# Altium PCB BtPS-250.PcbDoc
Units mm, origin at the board's own origin, x right, y up, seen from the top; angles counter-clockwise.
Board outline 228 x 101 mm, 2 copper layers (Top Layer, Bottom Layer); 151 components, 89 nets, 441 pads, 4 vias.
Unrouted connection lines stored in the file: 92.
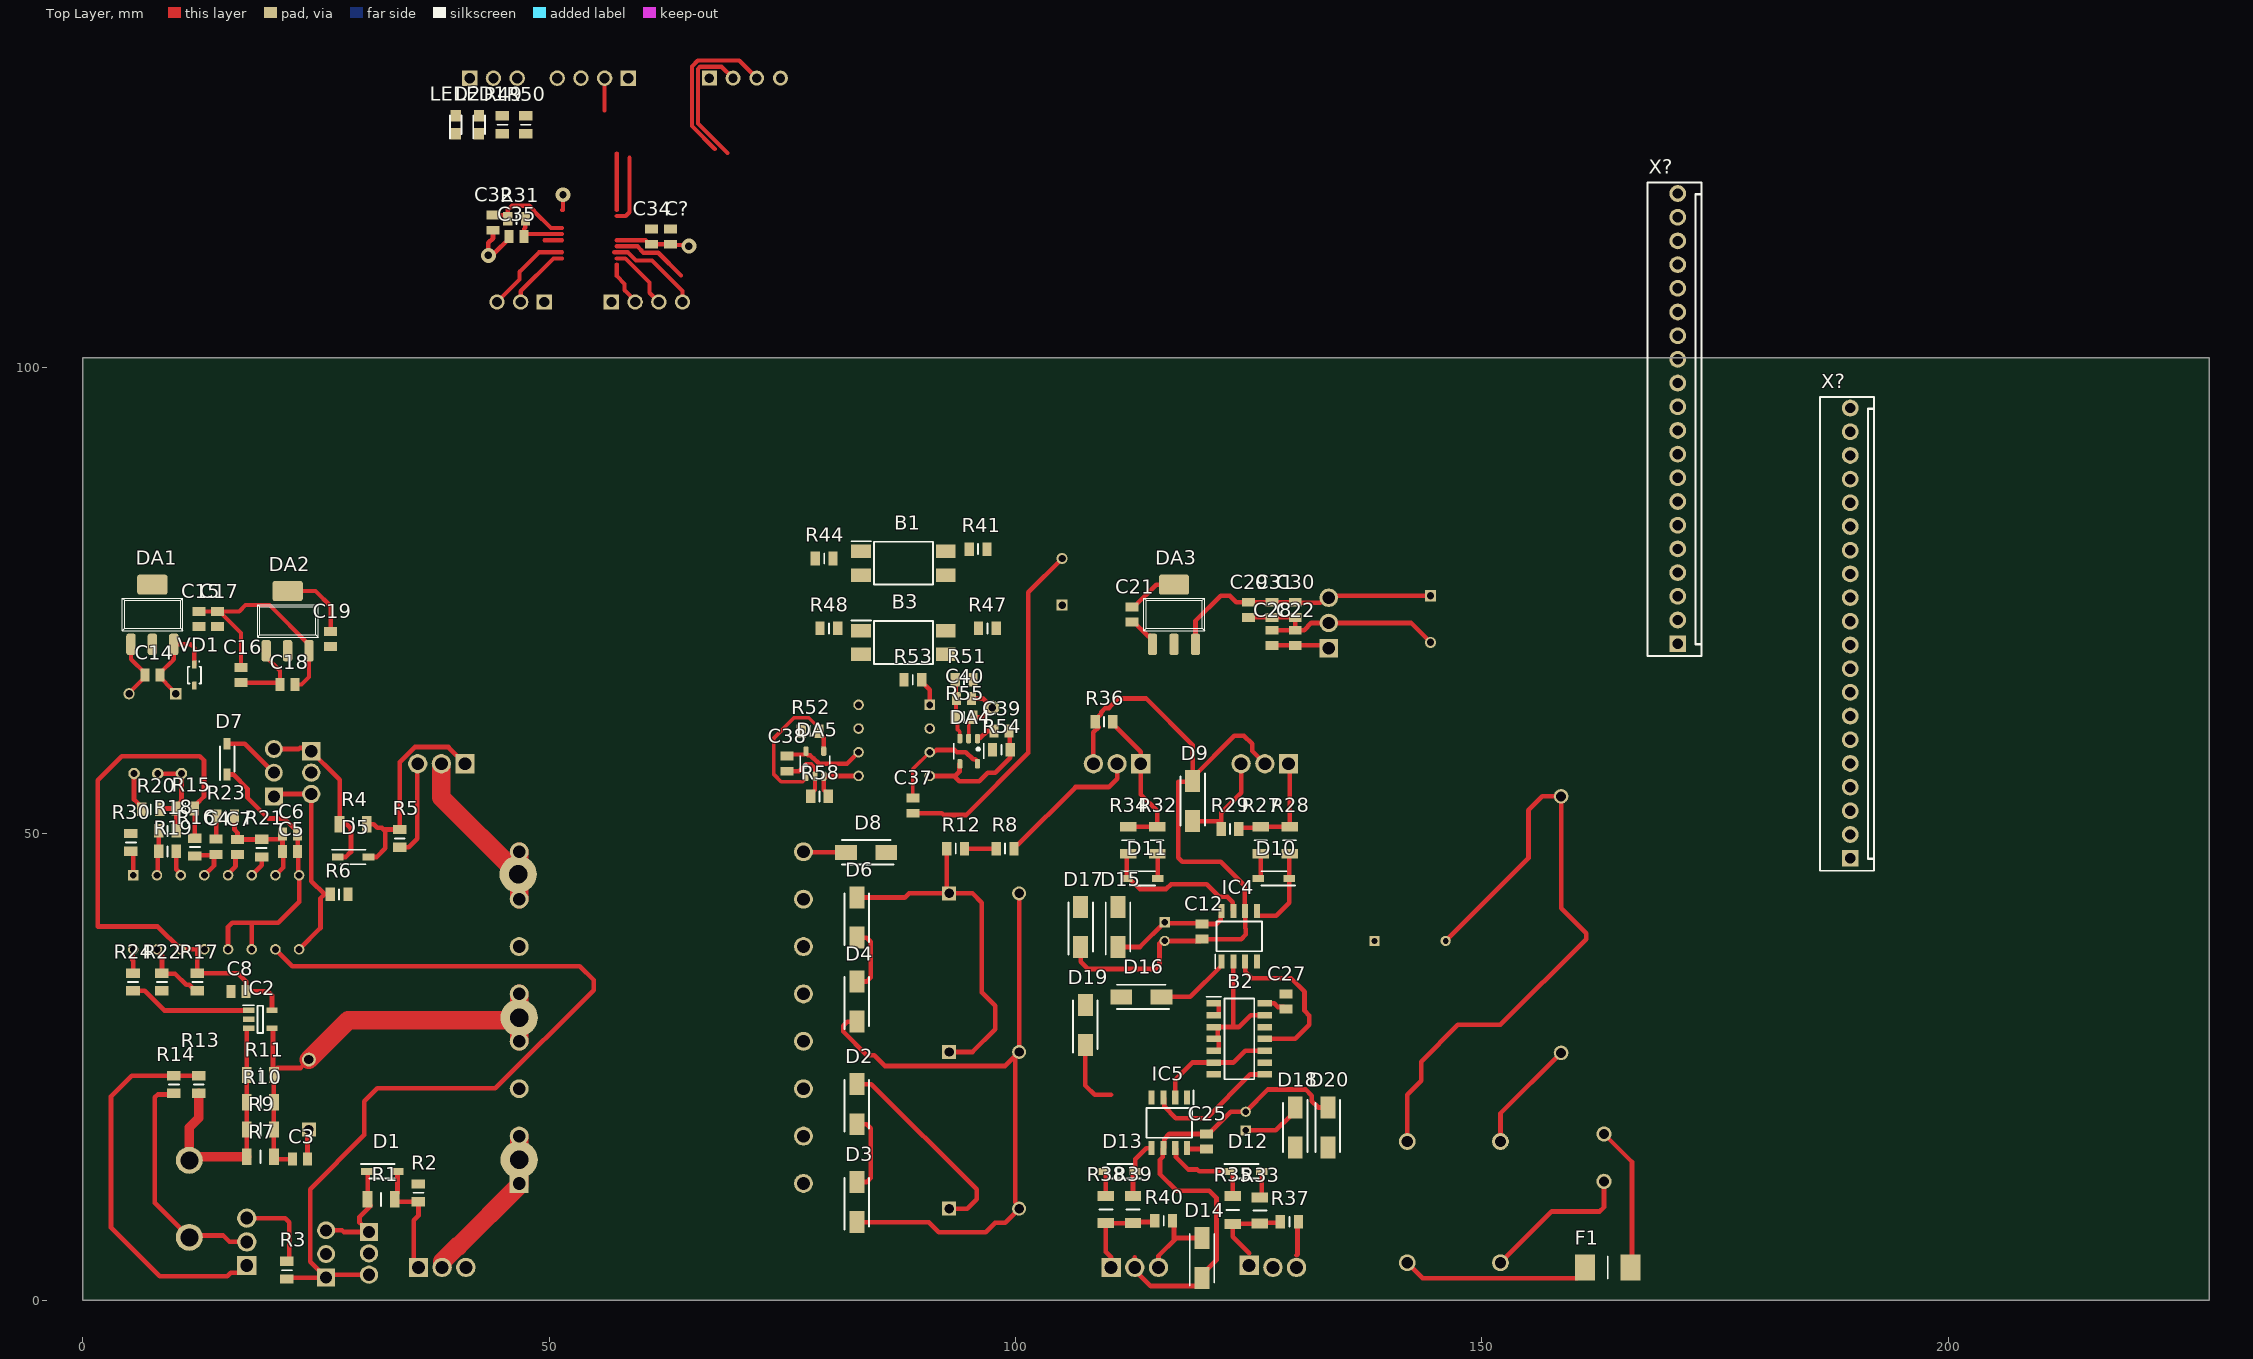
[diagram p0: Top Layer view]
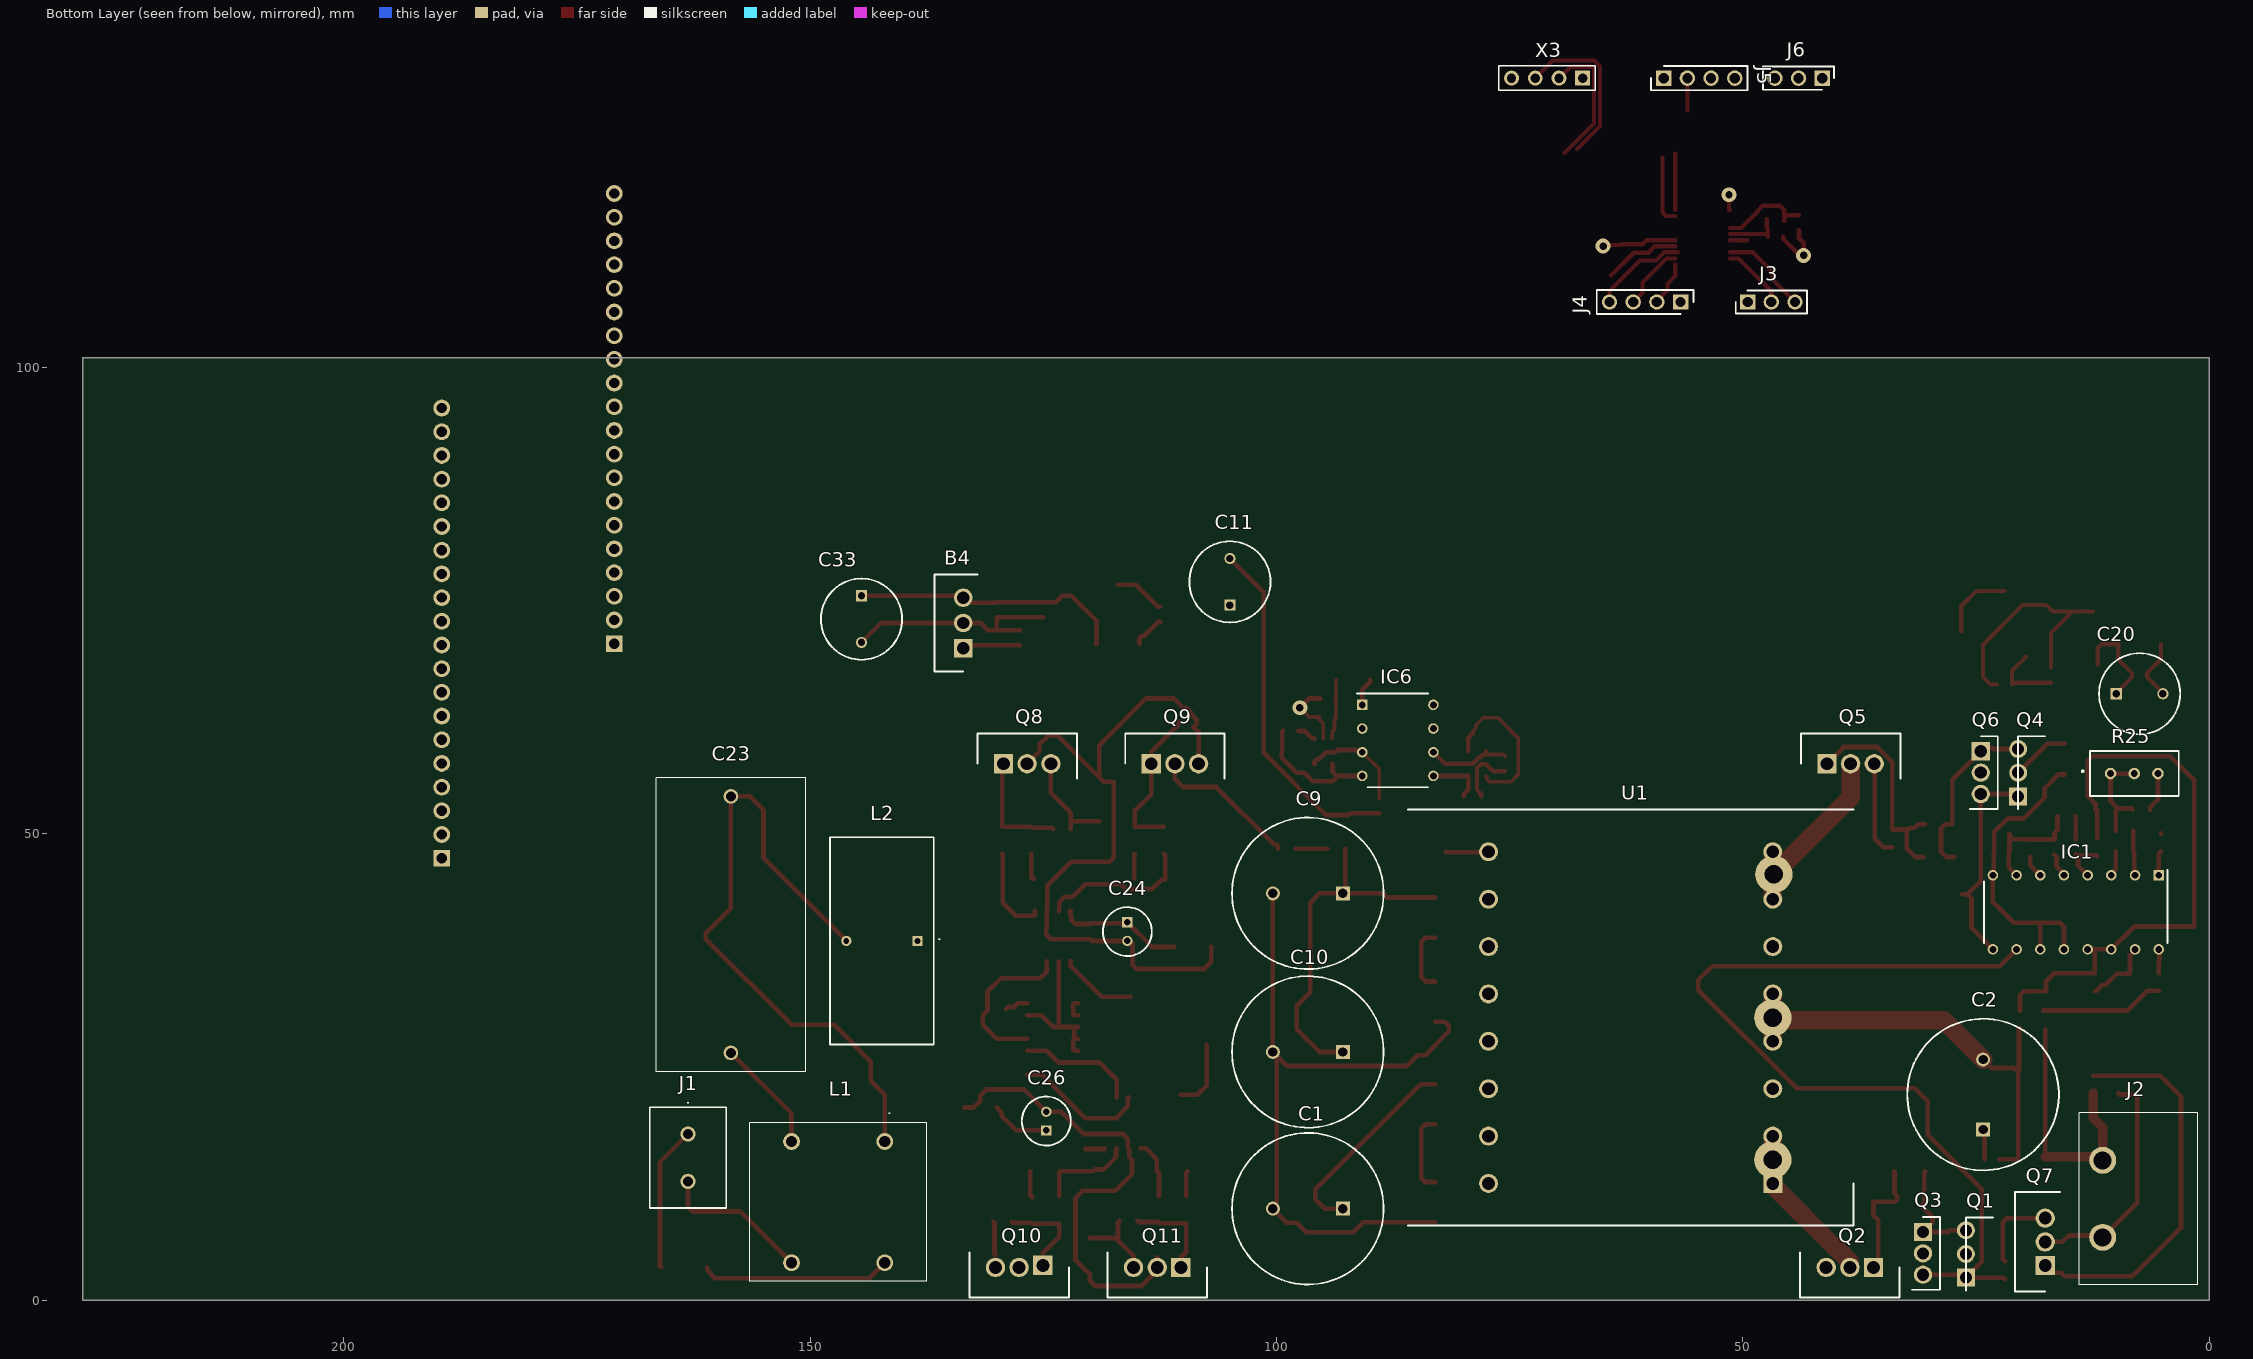
[diagram p1: Bottom Layer view, seen from below]
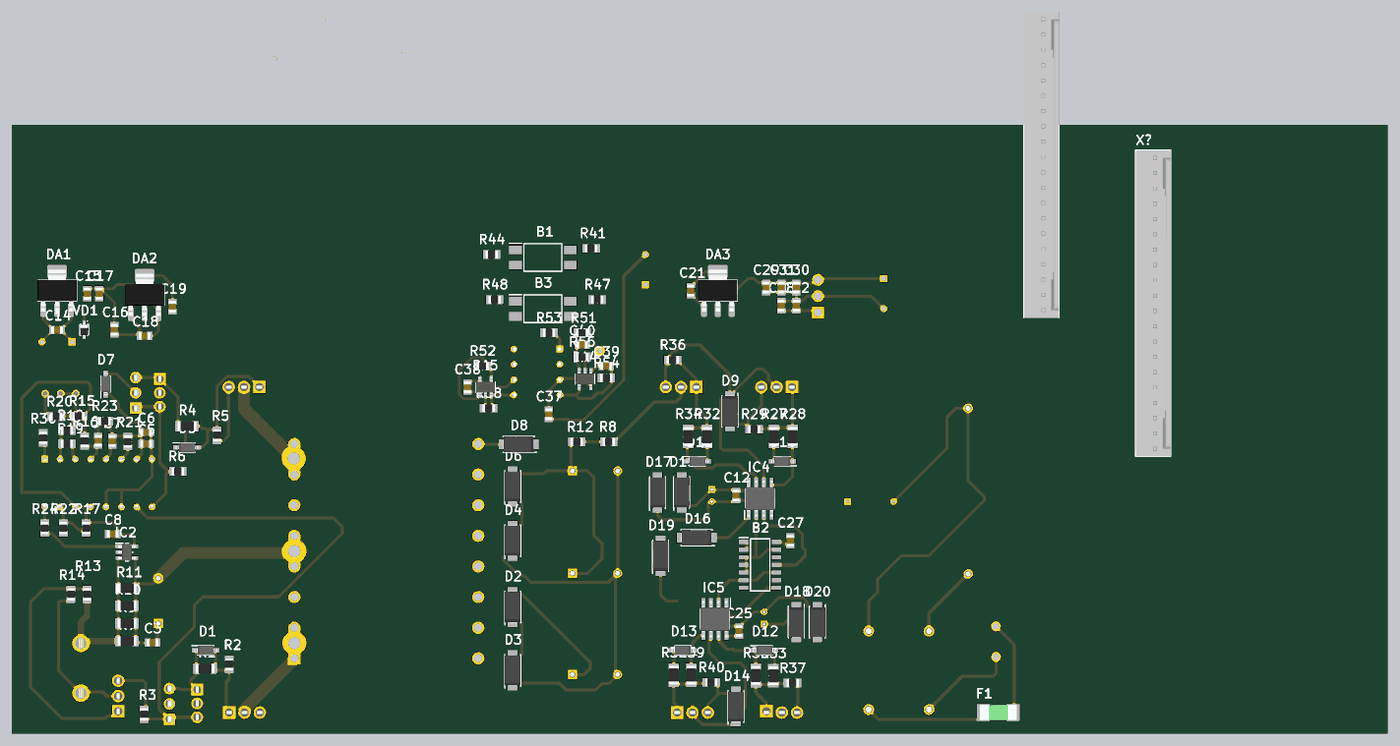
[diagram p2: 3D render of the assembled board from above, using the file's embedded part models]
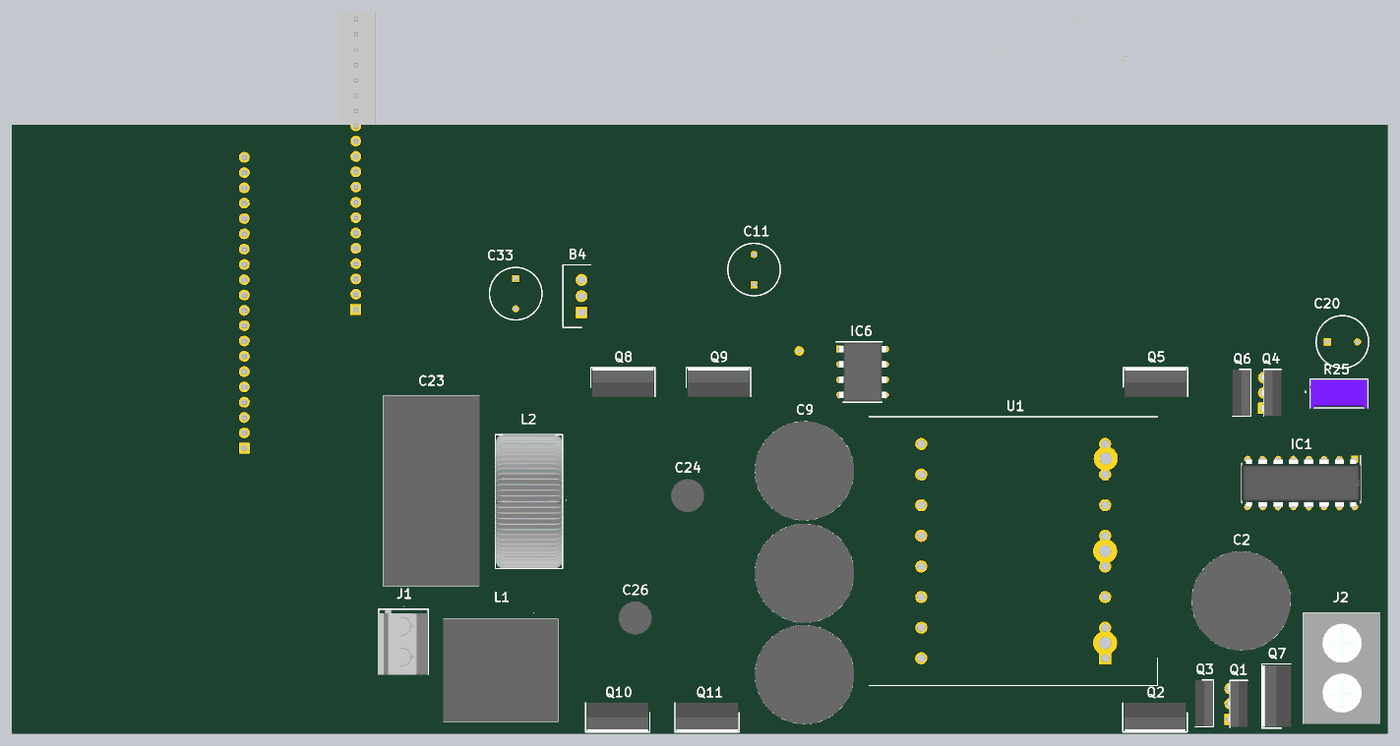
[diagram p3: 3D render of the assembled board from below, using the file's embedded part models]

## Layer stack, top to bottom
Top Solder: solder mask 0.0102, Solder Resist, Dk 3.5
Top Layer: signal copper 0.0356
Dielectric 1: dielectric 0.32, FR-4, Dk 4.8
Bottom Layer: signal copper 0.0356
Bottom Solder: solder mask 0.0102, Solder Resist, Dk 3.5

## Board outline
0,0 0,101 228,101 228,0

## Design rules (kind name [scope] priority, off if disabled: settings)
Clearance Clear_smol [InNetClass('NET_MCU')] p1: gap=0.2 ignorepadtopadclearanceinfootprint=TRUE
Clearance [All] p2: gap=0.5 ignorepadtopadclearanceinfootprint=TRUE
Height [All] p1 off: minheight=0 maxheight=25.4 prefheight=12.7
PolygonConnect [All] p1: connectstyle=Relief reliefconductorwidth=0.254 reliefentries=4 polygonreliefangle="90 Angle" airgapwidth=0.254
RoomDefinition PWM_inverter [InComponentClass('PWM_inverter')] p1 off: confinementstyle=ConfineIn formatcopy=TRUE lockcomponents=FALSE outline -25.4,-25.4 25.4,-25.4 25.4,0 -25.4,0
RoomDefinition Boost_Driver [InComponentClass('Boost_Driver')] p2 off: confinementstyle=ConfineIn formatcopy=TRUE lockcomponents=FALSE outline -25.4,-25.4 25.4,-25.4 25.4,0 -25.4,0
RoomDefinition PWM_Driver [InComponentClass('PWM_Driver')] p3 off: confinementstyle=ConfineIn formatcopy=TRUE lockcomponents=FALSE outline -25.4,-25.4 83.693,-25.4 83.693,38.862 -25.4,38.862
RoomDefinition Power_suply [InComponentClass('Power_suply')] p4 off: confinementstyle=ConfineIn formatcopy=TRUE lockcomponents=FALSE outline -65.913,250.317 18.161,250.317 18.161,311.785 -65.913,311.785
RoomDefinition Mesure [InComponentClass('Mesure')] p5 off: confinementstyle=ConfineIn formatcopy=TRUE lockcomponents=FALSE outline 55.494,281.968 107.564,281.968 107.564,315.623 55.494,315.623
RoomDefinition MCU [InComponentClass('MCU')] p6 off: confinementstyle=ConfineIn formatcopy=TRUE lockcomponents=FALSE outline 98.679,228.661 160.147,228.661 160.147,271.46 98.679,271.46
RoutingVias [All] p1: holewidth=0.8 width=1.6 viastyle="Through Hole" minholewidth=0.6 minwidth=1.5 maxholewidth=1 maxwidth=3
SolderMaskExpansion [All] p1: expansion=0.102 istentingtop=FALSE
Width [All] p1: maxlimit=5 minlimit=0.3 preferedwidth=0.5
29 further rules are at their usual default settings.

## Classes and differential pairs
component class MCU: C32 C34 C35 C? J3 J4 J5 J6 LED1 LED2 R31 R49 R50 X3 X?
component class PWM_Driver: B1 B2 B3 C12 C24 C25 C26 C27 D15 D16 D17 D18 D19 D20 IC4 IC5 R41 R44 R47 R48
component class Mesure: C37 C38 C39 C40 DA4 DA5 IC6 R51 R52 R53 R54 R55 R58
component class PWM_inverter: C23 D9 D10 D11 D12 D13 D14 F1 J1 L1 L2 Q8 Q9 Q10 Q11 R27 R28 R29 R32 R33 R34 R35 R36 R37 R38 R39 R40
component class Power_suply: B4 C14 C15 C16 C17 C18 C19 C20 C21 C22 C28 C29 C30 C31 C33 DA1 DA2 DA3 VD1
component class Boost_Driver: C4 C5 C6 C7 C8 D7 IC1 IC2 R15 R16 R17 R18 R19 R20 R21 R22 R23 R24 R25 R30

## Components (designator, comment, footprint, x,y, rotation, side; value= is the part's Value field where it differs from the comment)
B1 "TLP521-1XSM" SOP254P1016X460-4N 88,79 r0 top
B2 "74HC00D" SOIC127P600X175-14N 124,28 r0 top
B3 "TLP521-1XSM" SOP254P1016X460-4N 88,70.5 r0 top
B4 "L7812ACV" TO270P460X1020X2008-3P 133.596,69.89 r90 bottom
C1 "22uF 600V" CAPPRD750W80D1625H2700 92.9,9.8 r0 bottom
C2 "470uF 35V" CAPPRD750W80D1625H2700 24.257,18.281 r90 bottom
C3 "0,1uF 50V 0805" CAPC2012X90N 23.3,15.1 r180 top
C4 "2.5 uF 50V" CAPC2012X90N 14.3,48.6 r270 top
C5 "10 uF 35V" CAPC2012X90N 22.238,48.073 r0 top
C6 "0,1uF 50V" CAPC2012X90N 22.238,49.978 r0 top
C7 "1n 50V" CAPC2012X90N 16.604,48.554 r270 top
C8 "0,1uF 50V" CAPC2012X90N 16.7,33.1 r0 top
C9 "22uF 600V" CAPPRD750W80D1625H2700 92.9,43.6 r0 bottom
C10 "22uF 600V" CAPPRD750W80D1625H2700 92.9,26.6 r0 bottom
C11 "100uF 50V" CAPPRD500W60D870H1200 105,74.5 r90 bottom
C12 "0,1uF 50V 0805" CAPC2012X90N 120,39.5 r90 top
C14 "10uF 50V 0805" CAPC2012X90N 7.475,67 r180 top
C15 "10uF 50V 0805" CAPC2012X90N 12.475,73 r270 top
C16 "10uF 50V 0805" CAPC2012X90N 16.975,67 r270 top
C17 "0,1uF 50V 0805" CAPC2012X90N 14.475,73 r270 top
C18 "10uF 50V 0805" CAPC2012X90N 21.975,66 r180 top
C19 "10uF 50V 0805" CAPC2012X90N 26.593,70.857 r270 top
C20 "100uF 50V" CAPPRD500W60D870H1200 9.975,65 r180 bottom
C21 "10uF 50V 0805" CAPC2012X90N 112.5,73.5 r270 top
C22 "10uF 50V 0805" CAPC2012X90N 130,71 r90 top
C23 "B32674D6335K" B32674D6335K 158.5,26.5 r90 bottom
C24 "UVR1V220MDD1FA" CAPPRD200W50D525H1250 116,40.5 r270 bottom
C25 "0,1uF 50V 0805" CAPC2012X90N 120.5,17 r270 top
C26 "UVR1V220MDD1FA" CAPPRD200W50D525H1250 124.69,18.19 r90 bottom
C27 "0,1uF 50V 0805" CAPC2012X90N 129,32 r90 top
C28 "1uF 50V 0805" CAPC2012X90N 127.5,71 r90 top
C29 "10uF 50V 0805" CAPC2012X90N 125,74 r270 top
C30 "0,1uF 50V 0805" CAPC2012X90N 130,74 r270 top
C31 "1uF 50V 0805" CAPC2012X90N 127.5,74 r270 top
C32 "0,1uF 50V 0805" CAPC2012X90N 44,115.5 r270 top
C33 "100uF 50V" CAPPRD500W60D870H1200 144.5,75.5 r270 bottom
C34 "0,1uF 50V 0805" CAPC2012X90N 61,114 r270 top
C35 "0,1uF 50V 0805" CAPC2012X90N 46.5,114 r180 top
C37 "0,1uF 50V 0805" CAPC2012X90N 89,53 r270 top
C38 "0,1uF 50V 0805" CAPC2012X90N 75.5,57.5 r90 top
C39 "100p 0805" CAPC2012X90N 98.5,61 r0 top
C40 "0,1uF 50V 0805" CAPC2012X90N 94.5,64.5 r0 top
C? "10uF 50V 0805" CAPC2012X90N 63,114 r270 top
D1 "1N4148W-E3-08" SOD3716X135N#1 32.1,13.8 r0 top
D2 "ES1D" DIOM5226X295N 83,21 r90 top
D3 "ES1D" DIOM5226X295N 83,10.5 r90 top
D4 "ES1D" DIOM5226X295N 83,32 r90 top
D5 "1N4148W-E3-08" SOD3716X135N#1 29,47.5 r0 top
D6 "ES1D" DIOM5226X295N 83,41 r90 top
D7 "1N4148W-E3-08" SOD3716X135N#1 15.5,58 r90 top
D8 "ES1D" DIOM5226X295N 84,48 r180 top
D9 "ES1D" DIOM5226X295N 119,53.5 r270 top
D10 "1N4148W-E3-08" SOD3716X135N#1 127.7,45.2 r180 top
D11 "1N4148W-E3-08" SOD3716X135N#1 113.6,45.2 r0 top
D12 "1N4148W-E3-08" SOD3716X135N#2 124.7,13.8 r0 top
D13 "1N4148W-E3-08" SOD3716X135N#1 111.2,13.8 r180 top
D14 "ES1D" DIOM5226X295N 120,4.5 r90 top
D15 "ES1D" DIOM5226X295N 111,40 r90 top
D16 "ES1D" DIOM5226X295N 113.5,32.5 r180 top
D17 "ES1D" DIOM5226X295N 107,40 r90 top
D18 "ES1D" DIOM5226X295N 130,18.5 r270 top
D19 "ES1D" DIOM5226X295N 107.5,29.5 r90 top
D20 "ES1D" DIOM5226X295N 133.5,18.5 r270 top
DA1 "" SOT-223 7.475,73.5 r0 top
DA2 "" SOT-223 21.975,72.81 r0 top
DA3 "" SOT-223 117,73.5 r0 top
DA4 "TLV9061IDBVR" SOT-23-5 94.99,58.84 r180 top
DA5 "TLV9061IDBVR" SOT-23-5 78.5,57.5 r0 top
F1 "0679H2000-05" FUSC6125X279N 163.5,3.5 r0 top
IC1 "TL494CN" DIP794W53P254L1930H508Q16N 14.318,41.569 r270 bottom
IC2 "INA180A2IDBVR" SOT95P280X145-5N 19.05,30.099 r0 top
IC4 "IR2102SPBF" SOIC127P600X175-8N#1 124,39 r90 top
IC5 "IR2102SPBF" SOIC127P600X175-8N#2 116.5,19 r270 top
IC6 "LOC110" DIP762W53P254L965H335Q8N 87,60 r180 bottom
J1 "0398800302" 0398800302 163.1,17.8 r270 bottom
J2 "0387006302" 0387006302 11.43,6.726 r90 bottom
J3 "961103-6404-AR" HDRV3W64P0X254_1X3_762X250X1050P 49.5,107 r180 bottom
J4 "961104-6404-AR" HDRV4W64P0X254_1X4_1016X250X800P 56.69,107 r0 bottom
J5 "961104-6404-AR" HDRV4W64P0X254_1X4_1016X250X800P 58.5,131 r180 bottom
J6 "961103-6404-AR" HDRV3W64P0X254_1X3_762X250X1050P 41.5,131 r0 bottom
L1 "BU10-6003R0BL" BU106003R0BL 142,17 r270 bottom
L2 "5704-RC" 5704RC 138.5,38.5 r0 bottom
LED1 "LTST-C171KRKT" LEDM2012X90N 42.5,126 r90 top
LED2 "LTST-C171KRKT" LEDM2012X90N 40,126 r90 top
Q1 "BD139" TO254P290X760X1320-3P 26.1,2.4 r90 bottom
Q2 "IRF2804PBF" TO254P482X1016X2192-3P#1 36,3.5 r0 bottom
Q3 "BD140" TO229P300X760X1364-3P 30.7,7.3 r270 bottom
Q4 "BD139" TO254P290X760X1320-3P 20.5,54 r90 bottom
Q5 "IRF2804PBF" TO254P482X1016X2192-3P#1 41,57.5 r180 bottom
Q6 "BD140" TO229P300X760X1364-3P 24.508,58.83 r270 bottom
Q7 "IRF2804PBF" TO254P482X1016X2192-3P#1 17.6,3.7 r90 bottom
Q8 "IRF2804PBF" TO254P482X1016X2192-3P#1 129.28,57.5 r180 bottom
Q9 "IRF2804PBF" TO254P482X1016X2192-3P#1 113.44,57.5 r180 bottom
Q10 "IRF2804PBF" TO254P482X1016X2192-3P#2 125.06,3.5 r0 bottom
Q11 "IRF2804PBF" TO254P482X1016X2192-3P#1 110.26,3.5 r0 bottom
R1 "10-1206" RESC3116X75N#1 32,10.8 r0 top
R2 "100k" RESC2013X65N#1 36,11.5 r270 top
R3 "4,7k" RESC2013X65N#1 21.9,3.2 r270 top
R4 "10-1206" RESC3116X75N#1 29,51 r0 top
R5 "100k" RESC2013X65N#1 34,49.5 r90 top
R6 "4,7k" RESC2013X65N#1 27.5,43.5 r180 top
R7 "0.002" RESC3116X75N#1 19.05,15.367 r0 top
R8 "36k" RESC2013X65N#1 98.9,48.4 r0 top
R9 "0.002" RESC3116X75N#1 19.05,18.288 r0 top
R10 "0.002" RESC3116X75N#1 19.05,21.209 r0 top
R11 "0.002" RESC3116X75N#1 19.05,24.13 r0 top
R12 "1k" RESC2013X65N#1 93.6,48.4 r0 top
R13 "18k" RESC2013X65N#1 12.446,23.114 r270 top
R14 "2k" RESC2013X65N#1 9.779,23.114 r90 top
R15 "10k" RESC2013X65N#1 11,52.7 r0 top
R16 "9.1k" RESC2013X65N#1 12.032,48.554 r90 top
R17 "10k" RESC2013X65N#1 12.3,34.1 r90 top
R18 "510" RESC2013X65N#1 9.1,50.3 r0 top
R19 "100k" RESC2013X65N#1 9.1,48.1 r0 top
R20 "2,2k" RESC2013X65N#1 7.3,52.6 r0 top
R21 "12k" RESC2013X65N#1 19.19,48.454 r270 top
R22 "2.2k" RESC2013X65N#1 8.5,34.1 r90 top
R23 "1k" RESC2013X65N#1 15.334,51.856 r180 top
R24 "12k" RESC2013X65N#1 5.4,34.1 r270 top
R25 "3296W-1-101LF" 3296W-1 8.05,56.442 r180 bottom
R27 "4.7-1206" RESC3116X75N#1 126.3,49.3 r90 top
R28 "20-1206" RESC3116X75N#1 129.4,49.3 r90 top
R29 "100k" RESC2013X65N#1 123,50.5 r0 top
R30 "100k" RESC2013X65N#1 5.174,49.062 r270 top
R31 "100k" RESC2013X65N#1 46.525,115.901 r0 top
R32 "4.7-1206" RESC3116X75N#1 115.2,49.3 r90 top
R33 "4.7-1206" RESC3116X75N#2 126.2,9.6 r270 top
R34 "20-1206" RESC3116X75N#1 112.1,49.3 r90 top
R35 "20-1206" RESC3116X75N#3 123.3,9.65 r270 top
R36 "100k" RESC2013X65N#1 109.5,62 r0 top
R37 "100k" RESC2013X65N#2 129.4,8.4 r180 top
R38 "4.7-1206" RESC3116X75N#1 109.7,9.7 r270 top
R39 "20-1206" RESC3116X75N#1 112.6,9.7 r270 top
R40 "100k" RESC2013X65N#1 115.9,8.5 r180 top
R41 "1k" RESC2013X65N#1 96,80.5 r0 top
R44 "330" RESC2013X65N#1 79.5,79.5 r0 top
R47 "1k" RESC2013X65N#1 97,72 r0 top
R48 "330" RESC2013X65N#1 80,72 r0 top
R49 "1k" RESC2013X65N#1 45,126 r90 top
R50 "1k" RESC2013X65N#1 47.5,126 r90 top
R51 "0" RESC2013X65N#1 94.5,66.5 r180 top
R52 "10k" RESC2013X65N#1 78,61 r180 top
R53 "200" RESC2013X65N#1 89,66.5 r0 top
R54 "10k" RESC2013X65N#1 98.5,59 r0 top
R55 "200k" RESC2013X65N#1 94.5,62.5 r180 top
R58 "10k" RESC2013X65N#1 79,54 r0 top
U1 "CPH-ETD39-1S-16P-C" DIPS3048W80P508L4460H3610Q16N 46.8,12.5 r0 bottom locked
VD1 "BAS316" SOD-323_MED 11.975,67 r270 top
X3 "PLS-4 (Part of PLS-40)" DS1021-04S 71,131 r0 bottom
X? "WH-20S" WF-20S 189.5,71.5 r90 top
X? "WH-20S" WF-20S 171,94.5 r90 top

## Footprints (in the part's own frame and the unit in brackets; to place one, negate y for a bottom-side part, rotate by r counter-clockwise, add the part's x,y. Pads: shape width x height; smd on the part's side, far side on the other; paste and mask are expansions set on the pad)
3296W-1 [mm]
  round 1.24 hole 0.74: 1(-2.54,0) 2(0,0) 3(2.54,0)
  silkscreen extent -5.64,-2.41 4.76,2.41, body extent -4.78,-2.48 4.78,2.35, height 11.55
5704RC [mm]
  rect 1.111x1.111 hole 0.606: 1(0,0)
  round 1.111 hole 0.606: 2(7.62,0)
  silkscreen extent -2.4,-11.11 9.36,11.11, body extent -1.74,-11.11 9.36,11.11, height 22.01
0387006302 [mm]
  round 2.895 hole 1.93: 1(0,0) 2(8.26,0)
  silkscreen extent -5.07,-10.16 13.33,2.54, body extent -5.1,-10.25 13.36,2.45, height 12.7
0398800302 [mm]
  round 1.65 hole 1.1: 1(0,0) 2(5.08,0)
  silkscreen extent -3.4,-4.1 7.95,4.1, body extent -2.78,-4.08 7.99,4.05, height 10.1
B32674D6335K [mm]
  round 1.575 hole 1.05: 1(0,0) 2(27.5,0)
  silkscreen extent -2,-8 29.5,8, body extent -2,-8 29.5,8, height 32.1
BU106003R0BL [mm]
  round 1.8 hole 1.2: 1(0,0) 2(0,-10) 3(13,-10) 4(13,0)
  silkscreen extent -3.1,-14.5 15,4.5, body extent -2,-14.5 15,4.5, height 22.6
CAPC2012X90N [mm]
  rect 0.96x1.39 smd: 1(-0.81,0) 2(0.81,0)
  body extent -1,-0.63 1,0.63, height 0.9
CAPPRD200W50D525H1250 [mm]
  rect 1.1x1.1 hole 0.7: 1(0,0)
  round 1.1 hole 0.7: 2(2,0)
  silkscreen extent -1.62,-2.63 3.62,2.62, body extent -1.75,-2.75 3.75,2.75, height 12.5
CAPPRD500W60D870H1200 [mm]
  rect 1.2x1.2 / inner round 1.2 / far side rect 1.2x1.2 hole 0.8: 1(0,0)
  round 1.2 hole 0.8: 2(5,0)
  silkscreen extent -1.85,-4.35 6.85,4.35
CAPPRD750W80D1625H2700 [mm]
  rect 1.5x1.5 hole 1: 1(0,0)
  round 1.5 hole 1: 2(7.5,0)
  silkscreen extent -4.37,-8.12 11.88,8.12, body extent -4.5,-8.25 12,8.25, height 27
DIOM5226X295N [mm]
  rect 2.35x1.6 smd: 1(-2.15,0) 2(2.15,0)
  silkscreen extent -2.95,-1.31 2.62,1.31, body extent -2.62,-1.31 2.62,1.31, height 2.95
DIP762W53P254L965H335Q8N [mm]
  rect 1.133x1.133 hole 0.733: 1(-3.81,3.81)
  round 1.133 hole 0.733: 2(-3.81,1.27) 3(-3.81,-1.27) 4(-3.81,-3.81) 5(3.81,-3.81) 6(3.81,-1.27) 7(3.81,1.27) 8(3.81,3.81)
  silkscreen extent -4.38,-5.02 3.24,5.02, body extent -3.94,-4.83 3.94,4.83, height 3.35
DIP794W53P254L1930H508Q16N [mm]
  rect 1.13x1.13 hole 0.73: 1(-3.97,8.89)
  round 1.13 hole 0.73: 2(-3.97,6.35) 3(-3.97,3.81) 4(-3.97,1.27) 5(-3.97,-1.27) 6(-3.97,-3.81) 7(-3.97,-6.35) 8(-3.97,-8.89) 9(3.97,-8.89) 10(3.97,-6.35) 11(3.97,-3.81) 12(3.97,-1.27) 13(3.97,1.27) 14(3.97,3.81) 15(3.97,6.35) 16(3.97,8.89)
  silkscreen extent -4.53,-9.84 3.3,9.84, body extent -3.94,-9.84 3.94,9.84, height 5.27
DIPS3048W80P508L4460H3610Q16N [mm]
  rect 2.025x2.025 hole 1.35: 1(0,0)
  round 2.025 hole 1.35: 2(0,-5.08) 3(0,-10.16) 4(0,-15.24) 5(0,-20.32) 6(0,-25.4) 7(0,-30.48) 8(0,-35.56) 9(30.48,-35.56) 10(30.48,-30.48) 11(30.48,-25.4) 12(30.48,-20.32) 13(30.48,-15.24) 14(30.48,-10.16) 15(30.48,-5.08) 16(30.48,0)
  silkscreen extent -8.66,-40.08 39.14,4.52
DS1021-04S [mm] "2.54mm 4-pin connector"
  rect 1.6x1.6 hole 1: 1(-3.81,0)
  round 1.6 hole 1: 2(-1.27,0) 3(1.27,0) 4(3.81,0)
  silkscreen extent -5.18,-1.33 5.18,1.33, body extent -5.08,-1.24 5.08,1.25, height 8.54
FUSC6125X279N [mm]
  rect 2.15x2.8 smd: 1(-2.455,0) 2(2.455,0)
  silkscreen extent 0,-1.17 0,1.17, body extent -3.05,-1.27 3.05,1.27, height 2.79
HDRV3W64P0X254_1X3_762X250X1050P [mm]
  rect 1.65x1.65 hole 1.1: 1(0,0)
  round 1.65 hole 1.1: 2(2.54,0) 3(5.08,0)
  silkscreen extent -1.27,-1.25 6.35,1.25, body extent -1.27,-1.25 6.35,1.25, height 10.5
HDRV4W64P0X254_1X4_1016X250X800P [mm]
  rect 1.65x1.65 hole 1.1: 1(0,0)
  round 1.65 hole 1.1: 2(2.54,0) 3(5.08,0) 4(7.62,0)
  silkscreen extent -1.37,-1.3 8.99,1.3, body extent -1.27,-1.25 8.89,1.25, height 8
LEDM2012X90N [mm]
  rect 1.25x1.1 smd: 1(-0.95,0) 2(0.95,0)
  silkscreen extent -1.5,-0.63 1,0.63
RESC2013X65N#1 [mm]
  rect 1x1.45 smd: 1(-0.95,0) 2(0.95,0)
  silkscreen extent 0,-0.54 0,0.54, body extent -1,-0.64 1,0.64, height 0.65
RESC2013X65N#2 [mm]
  rect 1x1.45 smd: 1(-0.95,0) 2(1,0)
  silkscreen extent 0,-0.54 0,0.54, body extent -1,-0.64 1,0.64, height 0.65
RESC3116X75N#1 [mm]
  rect 1.05x1.75 smd: 1(-1.45,0) 2(1.45,0)
  silkscreen extent 0,-0.7 0,0.7, body extent -1.55,-0.8 1.55,0.8, height 0.75
RESC3116X75N#2 [mm]
  rect 1.05x1.75 smd: 1(-1.4,0) 2(1.4,0)
  silkscreen extent 0,-0.7 0,0.7, body extent -1.55,-0.8 1.55,0.8, height 0.75
RESC3116X75N#3 [mm]
  rect 1.05x1.75 smd: 1(-1.5,0) 2(1.5,0)
  silkscreen extent 0,-0.7 0,0.7, body extent -1.55,-0.8 1.55,0.8, height 0.75
SOD3716X135N#1 [mm]
  rect 1.25x0.75 smd: 1(-1.65,0) 2(1.65,0)
  silkscreen extent -2.27,-0.77 1.35,0.77, body extent -1.85,-0.77 1.85,0.77, height 1.35
SOD3716X135N#2 [mm]
  rect 1.25x0.75 smd: 1(-1.7,0) 2(1.7,0)
  silkscreen extent -2.27,-0.77 1.35,0.77, body extent -1.85,-0.77 1.85,0.77, height 1.35
SOD-323_MED [mm] "SOD-323, 2-Leads, Body 1,25x2,50mm, IPC Medium Density"
  rrect15% 0.85x0.45 smd paste+0 mask+0.05: AN(1.125,0) CA(-1.125,0)
  silkscreen extent -1.5,-0.7 0.9,0.7, body extent -1.3,-0.67 1.3,0.68, height 1.1
SOIC127P600X175-8N#1 [mm]
  rect 1.525x0.65 smd: 1(-2.712,1.905) 2(-2.712,0.635) 3(-2.712,-0.635) 4(-2.712,-1.905) 5(2.712,-1.905) 6(2.712,-0.635) 7(2.712,0.635) 8(2.712,1.905)
  silkscreen extent -3.47,-2.45 1.6,2.58, body extent -3,-2.45 3,2.45, height 1.75
SOIC127P600X175-8N#2 [mm]
  rect 1.525x0.65 smd: 1(-2.712,1.905) 2(-2.712,0.635) 3(-2.712,-0.635) 4(-2.712,-1.905) 5(2.712,-1.905) 6(2.712,-0.635) 7(2.706,0.632) 8(2.712,1.905)
  silkscreen extent -3.47,-2.45 1.6,2.58, body extent -3,-2.45 3,2.45, height 1.75
SOIC127P600X175-14N [mm]
  rect 1.55x0.7 smd: 1(-2.725,3.81) 2(-2.725,2.54) 3(-2.725,1.27) 4(-2.725,0) 5(-2.725,-1.27) 6(-2.725,-2.54) 7(-2.725,-3.81) 8(2.725,-3.81) 9(2.725,-2.54) 10(2.725,-1.27) 11(2.725,0) 12(2.725,1.27) 13(2.725,2.54) 14(2.725,3.81)
  silkscreen extent -3.5,-4.33 1.6,4.51
SOP254P1016X460-4N [mm]
  rect 2.1x1.45 smd: 1(-4.55,1.27) 2(-4.55,-1.27) 3(4.55,-1.27) 4(4.55,1.27)
  silkscreen extent -5.6,-2.3 3.15,2.34
SOT95P280X145-5N [mm]
  rect 1.2x0.6 smd: 1(-1.25,0.95) 2(-1.25,0) 3(-1.25,-0.95) 4(1.25,-0.95) 5(1.25,0.95)
  silkscreen extent -1.85,-1.45 0.3,1.5, body extent -1.4,-1.45 1.4,1.45, height 1.2
SOT-23-5 [mm] "SOT23, 5-Leads, Body 2,80x1,60mm, Pitch 0,95mm, IPC Medium Density"
  rrect50% 0.55x1 smd mask+0.05: 1(-0.95,-1.35) 2(0,-1.35) 3(0.95,-1.35) 4(0.95,1.35) 5(-0.95,1.35)
  silkscreen extent -1.59,-0.88 1.59,0.85, body extent -1.55,-1.6 1.55,1.6, height 1.45
SOT-223 [mm]
  rrect50% 1x2.3 smd mask+0.05: 1(-2.3,-3.2) 2(0,-3.2) 3(2.3,-3.2)
  rrect25% 3.25x2.15 smd mask+0.05: 4(0,3.2)
  silkscreen extent -3.22,-1.75 3.28,1.75, body extent -3.25,-3.48 3.25,3.48, height 1.68
TO229P300X760X1364-3P [mm]
  rect 1.95x1.95 hole 1.3: 1(0,0)
  round 1.95 hole 1.3: 2(2.29,0) 3(4.58,0)
  silkscreen extent -1.61,-1.17 6.19,1.83, body extent -1.51,-1.17 6.09,1.83, height 12.76
TO254P290X760X1320-3P [mm]
  rect 1.92x1.92 hole 1.28: 1(0,0)
  round 1.92 hole 1.28: 2(2.54,0) 3(5.08,0)
  silkscreen extent -1.36,-2.9 6.44,0, body extent -1.26,-2.9 6.34,0.25, height 12.92
TO254P482X1016X2192-3P#1 [mm]
  rect 2.07x2.07 hole 1.38: 1(0,0)
  round 2.07 hole 1.38: 2(2.54,0) 3(5.08,0)
  silkscreen extent -2.79,-1.6 7.87,3.22, body extent -2.54,-1.59 7.62,3.22, height 21.25
TO254P482X1016X2192-3P#2 [mm]
  rect 2.07x2.07 hole 1.38: 1(0,-0.223)
  round 2.07 hole 1.38: 2(2.54,0) 3(5.08,0)
  silkscreen extent -2.79,-1.6 7.87,3.22, body extent -2.54,-1.6 7.62,3.23, height 21.25
TO270P460X1020X2008-3P [mm]
  rect 1.98x1.98 / inner round 1.98 / far side rect 1.98x1.98 hole 1.32: 1(0,0)
  round 1.98 hole 1.32: 2(2.7,0) 3(5.4,0)
  silkscreen extent -2.5,-1.53 7.9,3.07
WF-20S [mm] "Connector; Header; 20 Position"
  rect 1.8x1.8 hole 1.1: 1(-24.13,0)
  round 1.8 hole 1.1: 2(-21.59,0) 3(-19.05,0) 4(-16.51,0) 5(-13.97,0) 6(-11.43,0) 7(-8.89,0) 8(-6.35,0) 9(-3.81,0) 10(-1.27,0) 11(1.27,0) 12(3.81,0) 13(6.35,0) 14(8.89,0) 15(11.43,0) 16(13.97,0) 17(16.51,0) 18(19.05,0) 19(21.59,0) 20(24.13,0)
  silkscreen extent -25.47,-2.54 25.33,3.25, body extent -25.5,-2.55 25.3,3.25, height 11.63

## Part data
B1 B3: "Optocoupler; SMD; Channels:1; Out: transistor; Uinsul:5.3kV", Manufacturer_Name=Isocom, Datasheet Link=https://datasheet.lcsc.com/szlcsc/Isocom-Components-TLP521-1XSM_C83157.pdf, Geometry.Height=4.6mm, Manufacturer_Part_Number=TLP521-1XSM
B2: "NEXPERIA - 74HC00D - NAND Gate, 74HC00, 2 Input, 5.2 mA, 2 V to 6 V, SOIC-14", Manufacturer_Name=Nexperia, Mouser Part Number=771-74HC00D, Datasheet Link=https://altium.componentsearchengine.com/Datasheets/2/74HC00D.pdf, Geometry.Height=1.75mm, Manufacturer_Part_Number=74HC00D, Mouser Price/Stock=https://www.mouser.co.uk/ProductDetail/Nexperia/74HC00D?qs=Q7xBXtx7xQgKEyQZmXe6mg%3D%3D
B4: "TO220 voltage regulator,L7812ACV 12V 1A STMicroelectronics L7812ACV, Single Linear Voltage Regulator, 1A 12 V, 2%, 3-Pin TO-220", Manufacturer_Name=STMicroelectronics, Mouser Part Number=511-L7812ACV, Arrow Part Number=L7812ACV, Arrow Price/Stock=https://www.arrow.com/en/products/l7812acv/stmicroelectronics?region=europe, Datasheet Link=http://www.st.com/web/en/resource/technical/document/datasheet/CD00000444.pdf, Geometry.Height=4.6mm, Manufacturer_Part_Number=L7812ACV, Mouser Price/Stock=https://www.mouser.co.uk/ProductDetail/STMicroelectronics/L7812ACV?qs=bZskSr8d5Y9fWhq%2FyUrU3A%3D%3D
C1 C2 C9 C10: library part UPW1H102MHD, "Capacitor", Height=27mm
C3 C4 C5 C6 C7 C8 C12 C14 C15 C16 C17 C18 C19 C21 C22 C25 C27 C28 C29 C30 C31 C32 C34 C35 C37 C38 C39 C40 C?: library part MCMT21N470F250CT, "Capacitor", Height=0.9mm
C11 C20 C33: library part MAL203690109E3, "Aluminum Electrolytic Capacitors - Radial Leaded 100uF 50V 20% Radial", Manufacturer_Name=Vishay, Mouser Part Number=594-2222-036-90109, Arrow Part Number=MAL203690109E3, Arrow Price/Stock=https://www.arrow.com/en/products/mal203690109e3/vishay, Datasheet Link=https://www.vishay.com/docs/28312/036rsp.pdf, Geometry.Height=12mm, Manufacturer_Part_Number=MAL203690109E3, Mouser Price/Stock=https://www.mouser.co.uk/ProductDetail/Vishay-BC-Components/MAL203690109E3?qs=4T%252B5yYZyZYdFWMOgqUZuiA%3D%3D
C23: "Capacitor", Manufacturer_Name=TDK, Mouser Part Number=871-B32674D6335K, Arrow Part Number=B32674D6335K, Arrow Price/Stock=https://www.arrow.com/en/products/b32674d6335k/epcos-tdk, Datasheet Link=https://en.tdk.eu/inf/20/20/db/fc_2009/MKP_B32674_678.pdf, Height=32mm, Manufacturer_Part_Number=B32674D6335K, Mouser Price/Stock=https://www.mouser.co.uk/ProductDetail/EPCOS-TDK/B32674D6335K?qs=IQR8xM2KsGjr5uKRT4Ngjw%3D%3D
C24 C26: "Capacitor Polarised", Manufacturer_Name=Nichicon, Mouser Part Number=647-UVR1V220MDD1FA, Datasheet Link=https://componentsearchengine.com/Datasheets/1/UVR1V220MDD1FA.pdf, Height=12.5mm, Manufacturer_Part_Number=UVR1V220MDD1FA, Mouser Price/Stock=https://www.mouser.co.uk/ProductDetail/Nichicon/UVR1V220MDD1FA/?qs=aEaV1LakhLZp9mEQuSYOqQ%3D%3D
D1 D5 D7 D10 D11 D12 D13: "Diode", Manufacturer_Name=Vishay, Mouser Part Number=78-1N4148W-E3-08, Arrow Part Number=1N4148W-E3-08, Arrow Price/Stock=https://www.arrow.com/en/products/1n4148w-e3-08/vishay?region=nac, Datasheet Link=http://www.vishay.com/docs/85748/1n4148w.pdf, Height=1.35mm, Manufacturer_Part_Number=1N4148W-E3-08, Mouser Price/Stock=https://www.mouser.co.uk/ProductDetail/Vishay-Semiconductors/1N4148W-E3-08?qs=bTzheeSci6TVjpxfjjRVMw%3D%3D
D2 D3 D4 D6 D8 D9 D14 D15 D16 D17 D18 D19 D20: "Diode", Manufacturer_Name=SMC, Datasheet Link=https://4donline.ihs.com/images/VipMasterIC/IC/SMCD/SMCD-S-A0005425901/SMCD-S-A0005425901-1.pdf?hkey=833C7E3902CC3CD9C0453977398360A8, Height=2.95mm, Manufacturer_Part_Number=ES1D
DA1 DA3: library part LM1117MP-3.3, "Linear Voltage Regulator IC 1 Output 800mA SOT-223", Package=SOT-223, Part Number=LM1117S-5.0, Component Type=SMD, ComponentLink1Description=Datasheet, ComponentLink1URL=https://www.ti.com/lit/ds/symlink/lm1117.pdf
DA2: library part LM1117MP-3.3, "Linear Voltage Regulator IC 1 Output 800mA SOT-223", Manufacturer="Texas Instruments", Package=SOT-223, Supplier Part Number 1=LM1117MP-3.3/NOPBTR-ND, Temperature range="0°C ~ 125°C", Ajax_1C_ID=9463, Ajax_1C_PN="LM1117MP-3.3 Molded SOT-223, 6.50 x 3.56 x 1.6mm Body, 4 Lead, 2.3mm Pitch MP04A_N	1SPX", Component Status="On Review", Component Type=SMD, ComponentLink1Description=Datasheet, ComponentLink1URL=https://www.ti.com/lit/ds/symlink/lm1117.pdf, GUID_1C=e0b887c0-e6df-11e6-82a6-d8cb8a9acc66, Lifecycle="RND Only", Part Number=LM1117MP-3.3, Part Type="Power / Linear Regulator", Replacement=NONE, Standard Lead Time="6 Weeks", Supplier 1=Digi-Key
DA4 DA5: "10MHz, 0.5pA Bias, Rail-to-Rail Input/Output, 1.8V CMOS Operational Amplifiers, 1 Channels, SOT-23-5", Manufacturer="Texas Instruments", Package=SOT-23-5, Supplier Part Number 1=296-52284-2-ND, Temperature range="-40°C ~ 125°C", Ajax_1C_ID=24284, Ajax_1C_PN="TLV9061IDBVR TI 1.8V-5.5V Operational Amplifier IC SOT23-5", Ajax_1С_Status="Mass Production", Component Type=SMD, ComponentLink1Description=Datasheet, ComponentLink1URL=https://www.ti.com/lit/ds/symlink/tlv9061.pdf, Part Number=TLV9061IDBVR, Part Type="Amplifier / OpAmp", Price=0,72409091, Replacement=NONE, Standard Lead Time="16 Weeks", Supplier 1=Digi-Key
F1: "Fuse", Manufacturer_Name="Bel Circuit Protection", Arrow Part Number=0679H2000-05, Arrow Price/Stock=https://www.arrow.com/en/products/0679h2000-05/bel-group?region=nac, Datasheet Link=https://www.arrow.com/en/products/0679h2000-05/bel-group, Height=2.79mm, Manufacturer_Part_Number=0679H2000-05
IC1: "Integrated Circuit", Manufacturer_Name="Texas Instruments", Mouser Part Number=595-TL494CN, Arrow Part Number=TL494CN, Arrow Price/Stock=https://www.arrow.com/en/products/tl494cn/texas-instruments?region=nac, Datasheet Link=http://www.ti.com/lit/gpn/tl494, Height=5.08mm, Manufacturer_Part_Number=TL494CN, Mouser Price/Stock=https://www.mouser.co.uk/ProductDetail/Texas-Instruments/TL494CN?qs=N6WZOzgtpqWAYQVxthNGyw%3D%3D
IC2: "Integrated Circuit", Manufacturer_Name="Texas Instruments", Mouser Part Number=595-INA180A2IDBVR, Arrow Part Number=INA180A2IDBVR, Arrow Price/Stock=https://www.arrow.com/en/products/ina180a2idbvr/texas-instruments?region=nac, Datasheet Link=http://www.ti.com/lit/ds/symlink/ina180.pdf, Height=1.45mm, Manufacturer_Part_Number=INA180A2IDBVR, Mouser Price/Stock=https://www.mouser.co.uk/ProductDetail/Texas-Instruments/INA180A2IDBVR?qs=5aG0NVq1C4wYcJfa99BoHg%3D%3D
IC4 IC5: "Integrated Circuit", Manufacturer_Name=Infineon, Mouser Part Number=942-IR2102SPBF, Arrow Part Number=IR2102SPBF, Arrow Price/Stock=https://www.arrow.com/en/products/ir2102spbf/infineon-technologies-ag?region=nac, Datasheet Link=https://www.infineon.com/cms/en/product/power/gate-driver-ics/?, Height=1.75mm, Manufacturer_Part_Number=IR2102SPBF, Mouser Price/Stock=https://www.mouser.co.uk/ProductDetail/Infineon-IR/IR2102SPBF?qs=dQmlx5f5cRJqfCRMLAcrGg%3D%3D
IC6: "Integrated Circuit", Manufacturer_Name=LITTELFUSE, Mouser Part Number=849-LOC110, Arrow Part Number=LOC110, Arrow Price/Stock=https://www.arrow.com/en/products/loc110/ixys, Datasheet Link=http://www.ixysic.com/home/pdfs.nsf/0/2E7C7ED81A9497A385256A2C0068BE89/$file/LOC110.pdf, Height=3.353mm, Manufacturer_Part_Number=LOC110, Mouser Price/Stock=https://www.mouser.co.uk/ProductDetail/IXYS-Integrated-Circuits/LOC110?qs=lQlU%252BwB40guWe%2FeQ%2FzktPA%3D%3D
J1 J2: "Connector", Manufacturer_Name=Molex, Mouser Part Number=N/A
  J1: Arrow Part Number=0398800302, Arrow Price/Stock=https://www.arrow.com/en/products/0398800302/molex?region=nac, Datasheet Link=https://www.molex.com/pdm_docs/sd/398800302_sd.pdf, Height=10.3mm, Manufacturer_Part_Number=0398800302, Mouser Price/Stock=https://www.mouser.co.uk/ProductDetail/Molex/0398800302?qs=PBcRNPEHKsqSgs7Dx0mONg%3D%3D
  J2: Arrow Part Number=0387006302, Arrow Price/Stock=https://www.arrow.com/en/products/0387006302/molex, Datasheet Link=https://datasheet.datasheetarchive.com/originals/distributors/Datasheets-DGA23/1543392.pdf, Height=13mm, Manufacturer_Part_Number=0387006302, Mouser Price/Stock=https://www.mouser.co.uk/ProductDetail/Molex/0387006302/?qs=PBcRNPEHKsoO9p6NPCT14g%3D%3D
J3 J6: "Connector", Manufacturer_Name=3M, Mouser Part Number=517-9611036404AR, Datasheet Link=https://datasheet.datasheetarchive.com/originals/distributors/Datasheets-DGA21/2082015.pdf, Height=10.5mm, Manufacturer_Part_Number=961103-6404-AR, Mouser Price/Stock=https://www.mouser.co.uk/ProductDetail/3M-Electronic-Solutions-Division/961103-6404-AR?qs=A%252BtsDZJT%252Bi8c%252BGQWaXFlLA%3D%3D
J4 J5: "Connector", Manufacturer_Name=3M, Mouser Part Number=517-9611046404AR, Datasheet Link=https://componentsearchengine.com/Datasheets/1/961104-6404-AR.pdf, Height=8mm, Manufacturer_Part_Number=961104-6404-AR, Mouser Price/Stock=https://www.mouser.co.uk/ProductDetail/3M-Electronic-Solutions-Division/961104-6404-AR?qs=A%252BtsDZJT%252Bi%2F2kLigPy7HDA%3D%3D
L1: "Inductor", Manufacturer_Name=COILCRAFT, Mouser Part Number=994-BU10-6003R0BL, Datasheet Link=https://componentsearchengine.com/Datasheets/1/BU10-6003R0BL.pdf, Height=22.5mm, Manufacturer_Part_Number=BU10-6003R0BL, Mouser Price/Stock=https://www.mouser.co.uk/ProductDetail/Coilcraft/BU10-6003R0BL?qs=ZYnrCdKdyec0p%252B8vTszPQw%3D%3D
L2: "Inductor High Current Toroid 275uH/150uH 15% 1KHz 2A 0.24Ohm DCR RDL", Manufacturer_Name=Bourns, Mouser Part Number=542-5704-RC, Datasheet Link=https://www.bourns.com/docs/Product-Datasheets/5700_series.pdf, Geometry.Height=22.225mm, Manufacturer_Part_Number=5704-RC, Mouser Price/Stock=https://www.mouser.co.uk/ProductDetail/JW-Miller/5704-RC?qs=bN78%2FnoHSDjVEliEAq9T7g%3D%3D
LED1 LED2: "LED", Manufacturer_Name=Lite-On, Mouser Part Number=859-LTST-C171KRKT, Arrow Part Number=LTST-C171KRKT, Arrow Price/Stock=https://www.arrow.com/en/products/ltst-c171krkt/lite-on-technology?region=nac, Datasheet Link=http://www.mouser.com/datasheet/2/239/Lite-On-LTST-C171KRKT-1175280.pdf, Height=0.9mm, Manufacturer_Part_Number=LTST-C171KRKT, Mouser Price/Stock=https://www.mouser.co.uk/ProductDetail/Lite-On/LTST-C171KRKT?qs=5XMAZBf2SiSTcAb1f5vDzw%3D%3D
Q1 Q4: "Transistor BJT NPN", Manufacturer_Name=STMicroelectronics, Mouser Part Number=511-BD139, Arrow Part Number=BD139, Arrow Price/Stock=https://www.arrow.com/en/products/bd139/stmicroelectronics?region=europe, Datasheet Link=http://www.st.com/web/en/resource/technical/document/datasheet/CD00001225.pdf, Height=2.9mm, Manufacturer_Part_Number=BD139, Mouser Price/Stock=https://www.mouser.co.uk/ProductDetail/STMicroelectronics/BD139?qs=ljbEvF4DwOPW%2FLxHSWYMMA%3D%3D
Q2 Q5 Q7 Q8 Q9 Q10 Q11: "MOSFET (N-Channel)", Manufacturer_Name=Infineon, Mouser Part Number=942-IRF2804PBF, Arrow Part Number=IRF2804PBF, Arrow Price/Stock=https://www.arrow.com/en/products/irf2804pbf/infineon-technologies-ag, Datasheet Link=https://componentsearchengine.com/Datasheets/1/IRF2804PBF.pdf, Height=4.82mm, Manufacturer_Part_Number=IRF2804PBF, Mouser Price/Stock=https://www.mouser.co.uk/ProductDetail/Infineon-IR/IRF2804PBF?qs=2r01AXMCG3OqtrI77lWLsA%3D%3D
Q3 Q6: library part BD138, "Transistor BJT PNP", Manufacturer_Name=onsemi, Mouser Part Number=863-BD138, Datasheet Link=http://www.onsemi.com/pub/Collateral/BD136-D.PDF, Height=3mm, Manufacturer_Part_Number=BD138, Mouser Price/Stock=https://www.mouser.co.uk/ProductDetail/onsemi/BD138?qs=vNc2DXHODiJSpBHA4I4SSg%3D%3D
R1 R4 R7 R9 R10 R11 R27 R28 R32 R33 R34 R35 R38 R39: library part MCMR12X1003FTL, "Resistor", Height=0.75mm
R2 R3 R5 R6 R8 R12 R13 R14 R15 R16 R17 R18 R19 R20 R21 R22 R23 R24 R29 R30 R31 R36 R37 R40 R41 R44 R47 R48 R49 R50 R51 R52 R53 R54 R55 R58: library part ERJP06J822V, "Resistor", Height=0.7mm
R25: "Resistor", Manufacturer_Name=Bourns, Mouser Part Number=652-3296W-1-101LF, Arrow Part Number=3296W-1-101LF, Arrow Price/Stock=https://www.arrow.com/en/products/3296w-1-101lf/bourns?region=europe, Datasheet Link=https://www.bourns.com/pdfs/3296.pdf, Manufacturer_Part_Number=3296W-1-101LF, Mouser Price/Stock=https://www.mouser.co.uk/ProductDetail/Bourns/3296W-1-101LF?qs=UcU9LKO1dwEefwKxVJG4Jw%3D%3D
U1: "Undefined or Miscellaneous", Manufacturer_Name=FERROXCUBE, Datasheet Link=http://www.farnell.com/datasheets/1935353.pdf, Height=36.1mm, Manufacturer_Part_Number=CPH-ETD39-1S-16P-C
VD1: "Diode Standard 100V 250mA, SOD-323/SC-76", Current=250mA, Manufacturer="Nexperia USA Inc.", Package=SOD-323, Supplier Part Number 1=1727-7370-2-ND, Temperature range="-65°C ~ 150°C", Voltage=100V, Ajax_1C_ID=3460, Ajax_1C_PN="BAS316,115 100V 0.25A(DC) Nexperia diode SOD-323", Ajax_1С_Status="Mass Production", Component Type=SMD, ComponentLink1Description=Datasheet, ComponentLink1URL=https://assets.nexperia.com/documents/data-sheet/BAS16_SER.pdf, Marking=A6, Part Number=BAS316, Part Type=General, Price=0,00753566, Replacement="BAS316,115 BAS316,135", Standard Lead Time="4 Weeks", Supplier 1=Digi-Key, Vf="1.25V @ 150mA"
X3: library part DS1021-04SF11, "4 Pin 2.54mm Male Header, Vertical, 3mm and 6.1mm, PLS-4", Manufacturer=Connfly, Temperature range="-40°C ~ 105°C", Ajax_1C_ID=1215, Ajax_1C_PN="PLS40, планки со штырьками", Ajax_1С_Status="Mass Production", Component Type=PTH, ComponentLink1Description=Datasheet, ComponentLink1URL=\\altiumdb.ajax.local\files\Datasheet\Connectors\DS1021.pdf, Part Number=DS1021-04SF11, Part Type="Header / Male Pin / Single Row", Price=0,001875, Replacement=NONE
X? X?: library part CI3120P1V00, "WH Series 2.54mm Wire to Board Straight DIP Type Headers, 20 Pin", Manufacturer=CviLux, Temperature range="-25℃ ~ 85℃", Ajax_1C_PN=NONE, Ajax_1С_Status="RND Only", Component Type=PTH, ComponentLink1Description=Datasheet, ComponentLink1URL=https://www.cvilux.com/uploads/drawings/100/723/CI3102S.pdf, Part Number=CI3120P1V00, Part Type="Wire-to-Board / Header", Price=NONE, Replacement=NONE

## Free pads (board coordinates)
  round 4 hole 2: 2(46.694,45.647) 3(46.8,30.28) 4(46.8,15.04)

## Via types
v1: diameter 1.6, hole 0.8, Top Layer to Bottom Layer, 4 vias

## Nets (pads, with @x,y where several pads share a name; then routed paths per layer and width w, separated by ;. In a path a pad name is that pad's centre, name@x,y a point inside that pad or via, vN(x,y) a via of type N, cw(c..) or ccw(c..) an arc to the next point about the centre after c; other vN are vias at no path point)
+3V3: C19.1 C34.1 C35.1 C?.1 DA2.2 DA2.4 J6.1 LED1.2 LED2.2 R31.2 X3.1 | length 14.2
  Top Layer w0.45: DA2.4 24.965,76.01 26.593,74.382 C19.1 ; R31.2 47.45,115.876 47.45,114.951 47.312,114.813 47.312,114.002 C35.1 47.31,114.02 47.565,114.275 51.391,114.275
+5V: C15.1 C16.1 C17.1 C18.1 C38.2 DA1.2 DA1.4 DA2.3 DA5.5 IC6.6 | length 35.3
  Top Layer w0.45: C15.1 C17.1 C17.1@14.69,73.81 ; C16.1 16.975,71.525 C17.1@14.69,73.81 ; C18.1 23.475,66 24.275,66.8 DA2.3 24.275,70.26 20.035,74.5 17.475,74.5 16.785,73.81 C17.1@14.69,73.81 ; C38.2 75.69,58.5 77.425,58.5 DA5.5@77.55,58.625 ; IC6.6 81.96,57.5 78.965,57.5 78.374,58.091 78.309,58.091 78,58.4 77.775,58.4 DA5.5@77.55,58.625 ; DA5.5@77.55,58.625 DA5.5 DA5.5@77.55,58.625
+5V_ISO: C21.1 C37.1 DA3.2 DA3.4 DA4.5 IC6.3 | length 17.1
  Top Layer w0.4: C37.1 89,56.92 IC6.3
  Top Layer w0.5: IC6.3 90.931,58.851 91.379,58.851 91.496,58.968 93.507,58.968 93.735,58.74 94.69,58.74 95.465,57.965 95.69,57.965 95.94,57.715 DA4.5 ; C21.1 112.715,74.31 115.105,76.7 DA3.4
+12V_ISO: B4.3 C29.1 C30.1 C31.1 C33.1 D15.2 D16.2 D18.2 D19.2 DA3.3 | length 29.6
  Top Layer w0.5: DA3.3 119.3,72.8 122,75.5 123,75.5 123.69,74.81 C29.1 C31.1 C30.1@130.215,74.81 ; C30.1 130.054,74.756 132.661,74.756 133.405,75.5 C33.1
AC12V: D8.2 U1.9 | length 4.6
  Top Layer w0.5: U1.9 77.34,48 D8.2
BAT_+: C2.2 C3.2 D7.2 IC2.4 pad.3 Q1.2 Q4.2 R7.2 R9.2 R10.2 R11.2 U1.4 U1.5 VD1.AN | length 55.9
  Top Layer w0.5: D7.2 17.39,59.65 Q4.2 ; IC2.4 20.35,29.149 20.4,29.099 20.4,24.58 R11.2@20.5,24.48 ; C3.2 20.583,15.1 20.5,15.017 R9.2 R10.2 R11.2 R11.2@20.5,24.48 ; C2.2 23.354,24.878 20.898,24.878 R11.2@20.5,24.48
  Top Layer w2: C2.2 28.476,30 46.8,30 U1.4 ; pad.3 U1.5
GND: B1.2 B3.2 C2.1 C3.1 C5.1 C6.1 C7.1 C8.1 C14.2 C15.2 C16.2 C17.2 C18.2 C19.2 C20.2 C32.2 C34.2 C35.2 C38.1 C?.2 DA1.1 DA2.1 DA5.2 IC1.7 IC2.2 J3.1 J5.1 Q2.3 Q3.2 Q5.3 Q6.2 Q7.3 R2.1 R3.1 R5.1 R6.1 R20.1 R21.1 R22.1 R23.1 R25.3 R58.1 X3.4 | length 74.5
  Top Layer w0.45: C20.2 4.975,65.095 6.665,66.785 C14.2 6.665,67.215 5.175,68.705 DA1.1 ; C16.2 20.975,66.19 C18.2 21.165,67.47 DA2.1@19.675,68.96 ; v1(43.5,112) 43.72,112.22 44.125,112.22 45.69,113.785 C35.2 ; 57.267,113.625 60.35,113.625 60.785,113.19 C34.2 C?.2 63.095,113.095 64.905,113.095 v1(65,113) ; C38.1 76.795,56.69 77.545,57.441 78.105,57.441 78.5,57.046 78.5,55.884 78.509,55.875 78.509,54.684 78.05,54.225 R58.1
  Top Layer w0.5: R25.3 5.51,53.665 6.35,52.825 R20.1 ; R23.1 16.284,50.414 16.604,50.094 C7.1 16.624,49.384 19.17,49.384 R21.1 21.069,49.404 C6.1@21.428,49.763 ; Q7.3 21.703,8.78 22.143,8.341 22.143,4.393 R3.1 ; IC1.7 21.5,46.371 21.5,48.001 C5.1 C6.1@21.428,49.763 ; C6.1 C6.1@21.428,49.763 ; C3.1 24.11,17.934 24.01,18.034 C2.1 ; R5.1 34.975,48.55 35.885,49.46 35.885,57.465 Q5.3 ; v1(43.5,112) 43.5,113.343 44,113.844 C32.2
HGND: B1.3 B2.7 B3.3 B4.2 C1.1 C9.1 C10.1 C11.2 C21.2 C22.2 C27.2 C28.2 C29.2 C30.2 C31.2 C33.2 C37.2 C40.2 D2.2 D6.2 D9.2 D14.2 D17.2 D20.2 DA3.1 DA4.2 IC4.4 IC5.4 Q8.3 Q11.3 R12.1 R29.1 R40.1 R53.1 R54.1 R55.1 | length 152.8
  Top Layer w0.4: DA4.2 94.99,61.815 95.45,62.275 R55.1 96.5,62.5 v1(97.5,63.5)
  Top Layer w0.5: D2.2 84.55,23.15 95.839,11.861 95.839,10.814 94.826,9.8 C1.1 ; D6.2 88.15,43.15 88.6,43.6 C9.1 ; C37.2 92.11,52.19 92.3,52 94.736,52 101.39,58.654 101.39,75.89 C11.2 ; R12.1 92.65,43.85 C9.1 ; C10.1 95.4,26.6 97.839,29.039 97.839,31.538 96.4,32.977 96.4,42.6 95.4,43.6 C9.1 ; C40.2 96.5,64.5 v1(97.5,63.5) ; C21.2 112.715,72.69 114.205,71.2 114.45,71.2 114.7,70.95 DA3.1 ; 115.34,4.6 115.34,4.69 ; 115.34,4.74 117.25,6.65 D14.2 ; R40.1 117,8.35 117,6.471 ; D9.2 122.05,51.35 ; R29.1 122.05,51.35 ; Q8.3 124.2,54.4 122.05,52.25 122.05,51.35 ; C29.2 C31.2 C30.2 C22.2 ; C28.2 C22.2 ; C33.2 142.41,72.59 131.725,72.59 130.945,71.81 C22.2
I_sens: IC1.16 R24.1 | length 2.6
  Top Layer w0.5: R24.1 5.439,35.089 5.439,36.361 5.348,36.452 5.348,37.519 IC1.16
I_SET: IC1.15 R17.1 R22.2 | length 7.4
  Top Layer w0.5: IC1.15 7.968,37.51 8.5,36.978 R22.2 8.55,35 9.9,35 11.1,33.8 11.425,33.8 12.075,33.15 R17.1
NetB1_1: B1.1 R44.2
NetB1_4: B1.4 B2.1 B2.2 R41.2 | length 2.2
  Top Layer w0.5: B2.2 121.7,30.54 121.8,30.64 121.8,31.71 121.7,31.81 B2.1
NetB2_3: B2.3 B2.4 B2.5 B2.13 IC4.2 | length 16.9
  Top Layer w0.5: B2.4 B2.4@121.7,28 ; B2.3 B2.3@121.7,29.27 ; 122.275,29.27 B2.3@121.7,29.27 ; 122.3,29.27 123.365,29.27 123.95,29.27 125.22,30.54 B2.13 ; 123.27,29.27 123.365,29.365 IC4.2 ; B2.5@121.7,26.73 B2.5 B2.5@121.7,26.73 ; B2.5@121.7,26.73 121.8,26.83 121.8,27.9 B2.4@121.7,28 ; B2.4@121.7,28 B2.3@121.7,29.27
NetB2_6: B2.6 B2.10 IC5.2 | length 12.8
  Top Layer w0.5: IC5.2 117.135,23.635 118.96,25.46 123.365,25.46 124.635,26.73 B2.10
NetB2_8: B2.8 IC5.3 | length 14.2
  Top Layer w0.5: IC5.3 115.94,21.637 115.94,20.759 117.199,19.5 120.5,19.5 125.19,24.19 B2.8
NetB2_9: B2.9 B2.12 B3.4 R47.2
NetB2_11: B2.11 IC4.3 | length 17.5
  Top Layer w0.5: IC4.3 124.635,35.189 125.324,34.5 129.546,34.5 131,33.046 131,31 131.5,30.5 131.5,29.5 130,28 B2.11
NetB2_14: B2.14 C27.1 R41.1 R47.1 | length 2.5
  Top Layer w0.5: B2.14 127.75,31.81 128.14,31.42 128.77,31.42 C27.1
NetB3_1: B3.1 R48.2
NetB4_1: B4.1 C11.1 C22.1 C28.1 D8.1 | length 6.2
  Top Layer w0.5: C28.1 C22.1 133.296,70.19 B4.1
NetC1_2: C1.2 C9.2 C10.2 D3.1 D4.1 Q9.2 Q10.2 R8.2 | length 91.6
  Top Layer w0.5: D3.1 90.731,8.35 91.803,7.278 96.797,7.278 97.819,8.3 98.9,8.3 C1.2 100.4,10.071 100,10.471 C10.2@100,26.2 ; D4.1 81.964,29.85 81.525,29.411 81.525,28.789 84.082,26.232 84.847,26.232 85.979,25.1 98.9,25.1 C10.2@100,26.2 ; R8.2 99.85,48.625 100.1,48.875 100.325,48.875 106.45,55 110,55 110.9,55.9 Q9.2 ; C9.2 C10.2 C10.2@100,26.2
NetC4_1: C4.1 R23.2 | length 2.5
  Top Layer w0.5: C4.1 14.342,49.452 14.342,51.814 R23.2
NetC4_2: C4.2 IC1.4 R16.1 | length 5.1
  Top Layer w0.5: R16.1 12.046,47.618 12.125,47.697 14.207,47.697 C4.2 14.082,47.572 14.082,46.573 IC1.4
NetC7_2: C7.2 IC1.5 | length 2.6
  Top Layer w0.5: IC1.5 15.588,45.709 16.393,46.514 16.393,47.533 C7.2
NetC12_1: C12.1 C24.2 D9.1 D17.1 IC4.6 L2.1 Q8.2 Q9.3 R36.1 | length 79.1
  Top Layer w0.5: D17.1 107,36.271 107.771,35.5 115.011,35.5 115.45,35.939 115.45,38.25 115.7,38.5 C24.2 119.81,38.5 C12.1 124.19,38.69 124.689,39.189 124.689,39.811 124.635,39.865 IC4.6 124.59,41.757 124.59,44.41 122,47 117.889,47 117.45,47.439 117.45,55.55 118.525,55.55 D9.1@118.812,55.838 ; Q9.3 108.36,60.86 108.912,61.413 108.55,61.775 108.55,62.225 109.2,62.875 109.2,63.036 109.639,63.475 110.025,63.475 111.05,64.5 114,64.5 119,59.5 119,56.025 123.475,60.5 124.5,60.5 125.379,59.621 125.379,58.861 Q8.2
NetC12_2: C12.2 C24.1 D15.1 IC4.8 | length 13.4
  Top Layer w0.5: D15.1 113.35,37.85 C24.1 116.095,40.405 119.905,40.405 C12.2 121.561,40.31 122,40.749 122,41.18 122.095,41.275 IC4.8
NetC14_1: C14.1 C20.1 DA1.3 VD1.CA | length 10.8
  Top Layer w0.45: C20.1 9.6,65.375 9.6,65.47 8.285,66.785 C14.1 8.285,67.215 9.775,68.705 9.775,69.746 DA1.3 11.58,70.3 11.975,69.905 VD1.CA
NetC23_1: C23.1 C25.1 C26.2 D14.1 D20.1 IC5.6 L1.2 Q10.3 Q11.2 R37.1 | length 66.9
  Top Layer w0.5: 112.8,4.6 112.8,3.2 114.5,1.5 119.45,1.5 120,2.05 120,2.725 121.55,4.275 121.55,10.95 120.777,11.723 117.277,11.723 115.5,13.5 115.5,15.045 115.79,15.335 115.79,16.213 IC5.6 115.94,16.363 115.94,17.25 116.5,17.81 C25.1 120.715,17.81 123.095,20.19 C26.2 127.075,22.575 131.111,22.575 131.78,21.905 131.78,21.32 132.45,20.65 D20.1 ; 130.14,4.8 130.245,4.905 130.245,8.295 R37.1 ; L1.2 152,20 C23.1
NetC23_2: C23.2 L1.1 L2.2 | length 70.5
  Top Layer w0.5: L1.1 142,22 143.5,23.5 143.5,25.561 147.439,29.5 152,29.5 161.189,38.689 161.189,39.311 158.5,42 C23.2 156.5,54 155,52.5 155,47.38 L2.2
NetC25_2: C25.2 C26.1 D18.1 IC5.8 | length 8.7
  Top Layer w0.5: IC5.8 118.405,16.265 118.48,16.19 C25.2 ; C26.1 127.915,18.19 129.45,19.725 129.45,20.1 D18.1
NetC32_1: C32.1 R31.1 | length 10.3
  Top Layer w0.45: C32.1 45.3,116.31 45.575,116.035 45.575,115.676 45.575,116.851 46.039,117.315 47.887,117.315 48.4,116.802 48.4,116.733 50.208,114.925 51.391,114.925
NetC39_1: C39.1 DA4.1 IC6.2 | length 2.1
  Top Layer w0.5: DA4.1 95.965,60.215 96.175,60.215 96.96,61 C39.1
NetC39_2: C39.2 DA4.4 IC6.4 R54.2 | length 14.4
  Top Layer w0.5: IC6.4 93.561,56.19 ; DA4.4 94,57.49 94,56.629 93.561,56.19 ; C39.2 99.38,60.93 99.38,59.07 R54.2 99.45,58.129 97.838,56.516 97.016,56.516 96.121,55.621 94,55.621 93.561,56.061 93.561,56.19
NetC40_1: C40.1 DA4.3 R51.2 R55.2 | length 6.6
  Top Layer w0.4: R51.2 93.62,66.43 93.62,64.57 C40.1 93.62,64.43 93.62,62.57 R55.2 93.8,62.25 93.8,61.18 94.04,60.94 DA4.3
NetD1_1: D1.1 Q1.3 Q3.1 R1.1 | length 12.3
  Top Layer w0.5: Q1.3 26.12,7.5 27.8,7.5 28,7.3 Q3.1 29.686,8.314 29.686,8.936 30.875,10.125 30.55,10.45 30.55,13.7 D1.1
NetD1_2: D1.2 Q2.1 R1.2 R2.2 | length 13.2
  Top Layer w0.5: D1.2 33.75,11.45 33.45,11.15 R1.2 33.7,10.55 R2.2 36,9.05 35.5,8.55 35.5,4 Q2.1
NetD2_1: D2.1 D3.2 U1.16 | length 8.7
  Top Layer w0.5: D3.2 84.05,12.65 84.489,13.089 84.489,18.411 84.05,18.85 D2.1
NetD4_2: D4.2 D6.1 U1.11 | length 7.2
  Top Layer w0.5: D4.2 84.05,34.15 84.489,34.589 84.489,38.411 84.05,38.85 D6.1
NetD5_1: D5.1 Q4.3 Q6.1 R4.1 | length 18.8
  Top Layer w0.5: Q4.3 23.166,59.08 23.266,59.18 24.158,59.18 27.55,55.788 R4.1 28.325,51 28.764,50.561 28.764,48.039 28.225,47.5 D5.1
NetD5_2: D5.2 Q5.1 R4.2 R5.2 | length 23.6
  Top Layer w0.5: R4.2 31.225,51 31.587,50.638 32.087,50.638 32.45,50.275 32.45,48.425 31.525,47.5 D5.2 ; 32.338,50.45 R5.2 34,57.68 35.605,59.285 39.215,59.285 Q5.1
NetD10_1: D10.1 IC4.5 R28.1 | length 9.8
  Top Layer w0.5: IC4.5 125.905,41.287 125.98,41.212 127.98,41.212 129.35,42.582 D10.1 129.35,47.8 R28.1
NetD10_2: D10.2 R27.1 | length 2.8
  Top Layer w0.5: D10.2 126.175,45.2 126.3,45.325 R27.1
NetD11_1: D11.1 IC4.7 R34.1 | length 16.6
  Top Layer w0.5: D11.1 D11.1@111.95,45.125 ; R34.1 111.95,47.7 D11.1@111.95,45.125 ; IC4.7 123.29,41.787 123.29,42.665 122.731,43.225 121.852,43.225 120.502,44.575 116.686,44.575 116.186,44.075 113.325,44.075 112.325,45.075 112,45.075 D11.1@111.95,45.125
NetD11_2: D11.2 R32.1 | length 2.7
  Top Layer w0.5: R32.1 115.25,47.8 D11.2
NetD12_1: D12.1 IC5.7 R35.1 | length 10.3
  Top Layer w0.5: IC5.7 117.207,16.219 117.207,15.337 118.545,14 119.5,14 119.7,13.8 D12.1 123.175,13.8 123.3,13.675 R35.1
NetD12_2: D12.2 R33.1 | length 2.9
  Top Layer w0.5: R33.1 126.4,11.2 D12.2
NetD13_1: D13.1 IC5.5 R39.1 | length 6.1
  Top Layer w0.5: R39.1 D13.1@112.6,13.675 ; D13.1 112.85,15.118 114.02,16.288 IC5.5
NetD13_2: D13.2 R38.1 | length 2.7
  Top Layer w0.5: D13.2 109.575,13.8 109.7,13.675 R38.1
NetD16_1: D16.1 IC4.1 | length 8.3
  Top Layer w0.5: D16.1 118.744,32.5 122.095,35.851 IC4.1
NetD19_1: D19.1 IC5.1 | length 7.5
  Top Layer w0.5: D19.1 107.5,23 108.5,22 110.245,22
NetDA5_1: DA5.1 DA5.4 R52.1 | length 16.7
  Top Layer w0.4: DA5.1 77.475,56.075 77.475,55.85 77.192,55.567 74.882,55.567 74.105,56.344 74.105,60.27 76.26,62.425 77.84,62.425 78.65,61.615 78.65,61.3 R52.1
  Top Layer w0.5: R52.1@78.95,60.775 79.45,60.275 DA5.4
NetDA5_3: DA5.3 IC6.5 R58.2 | length 6.1
  Top Layer w0.5: R58.2 79.95,54.225 79.45,54.725 79.45,56.165 79.475,56.19 IC6.5
NetF1_1: F1.1 L1.4 | length 20.4
  Top Layer w0.5: L1.4 143.65,2.35 160.22,2.35 161.045,3.175 F1.1
NetF1_2: F1.2 J1.1 | length 15.6
  Top Layer w0.5: J1.1 166.1,14.8 166.1,3.645 F1.2
NetIC1_3: IC1.3 R19.2 | length 2.8
  Top Layer w0.5: R19.2 10.05,46.167 10.508,45.709 IC1.3
NetIC1_6: IC1.6 R21.2 | length 2.4
  Top Layer w0.5: IC1.6 19.19,46.601 R21.2
NetIC1_9: IC1.9 Q4.1 Q6.3 R6.2 | length 23.5
  Top Layer w0.5: IC1.9 25.5,39.891 25.5,43.061 25.939,43.5 ; R6.2 25.939,43.5 ; Q4.1@20.75,54.25 Q6.3 24.523,54.235 24.523,44.916 25.939,43.5 ; Q4.1@20.75,54.25 Q4.1 Q4.1@20.75,54.25
NetIC1_10: IC1.10 Q1.1 Q3.3 R3.2 | length 97.1
  Top Layer w0.5: IC1.10 22.478,35.789 53.311,35.789 54.789,34.311 54.789,33.237 44.253,22.7 31.6,22.7 30.2,21.3 30.2,17.7 24.39,11.89 24.39,4.11 Q1.1 ; R3.2 22.05,2.4 Q1.1 ; Q3.3 26.42,2.72 Q1.1
NetIC2_1: IC2.1 R24.2 | length 13.3
  Top Layer w0.5: R24.2 6.639,33.15 8.74,31.049 IC2.1
NetIC2_3: IC2.3 J2.2 R7.1 R9.1 R10.1 R11.1 R13.2 | length 27.6
  Top Layer w0.5: R7.1 R9.1 R10.1 R11.1 IC2.3@17.6,29.049
  Top Layer w1: R13.2 12.446,19.515 11.43,18.499 J2.2 11.793,15.349 13.133,15.349 13.151,15.367 R7.1
NetIC6_1: IC6.1 R53.2 | length 3
  Top Layer w0.5: R53.2 89.95,66.275 90.81,65.415 IC6.1
NetJ1_2: J1.2 L1.3 | length 16.3
  Top Layer w0.5: L1.3 157.5,9.5 162.661,9.5 163.1,9.939 J1.2
NetJ2_1: J2.1 Q7.2 R14.1 | length 25
  Top Layer w0.5: R14.1 9.652,22.037 8.04,22.037 7.747,21.744 7.747,10.409 J2.1 ; J2.1@11.623,6.919 15.065,6.919 15.744,6.24 Q7.2
NetJ4_1: J4.1
NetJ4_2: J4.2 | length 4.8
  Top Layer w0.45: 57.267,111.025 57.267,109.773 58.097,108.943 58.097,108.268 59.23,107.135 J4.2
NetJ4_3: J4.3 | length 7.1
  Top Layer w0.45: 57.267,111.675 58.181,111.675 60.775,109.081 60.775,107.995 J4.3
NetJ4_4: J4.4 | length 10.2
  Top Layer w0.45: 57,112.325 58.181,112.325 58.45,112.325 59.325,111.45 61.05,111.45 64.31,108.19 J4.4
NetJ5_2: J5.2 | length 3.5
  Top Layer w0.45: 55.96,127.54 J5.2
NetJ5_3: J5.3
NetJ5_4: J5.4
NetJ6_2: J6.2 R50.2
NetJ6_3: J6.3 R49.2
NetLED1_1: LED1.1 R49.1
NetLED2_1: LED2.1 R50.1
NetQ2_2: pad.4 Q2.2 U1.1 U1.2 | length 16.5
  Top Layer w2: Q2.2 38.553,3.513 38.553,4.134 40.154,5.735 40.235,5.735 U1.1@46.8,12.3 ; U1.1 pad.4@46.8,14.2 ; pad.4 U1.2
NetQ5_2: pad.2 Q5.2 U1.7 U1.8 | length 20.5
  Top Layer w2: Q5.2 38.46,53.88 pad.2 ; U1.7 46.8,45.647 pad.2 ; U1.8 46.795,48.055 46.795,47.173 46.795,46.42 46.795,45.748 pad.2
NetQ7_1: Q7.1 R13.1 R14.2 | length 41.6
  Top Layer w0.5: R13.1 R14.2 5.268,24.064 3.048,21.844 3.048,7.747 8.255,2.54 15.494,2.54 15.869,2.915 16.815,2.915 Q7.1
NetQ8_1: Q8.1 R27.2 R28.2 R29.2 | length 12.4
  Top Layer w0.5: R29.2 124.075,50.625 126.175,50.625 R27.2 R28.2 129.4,57.38 Q8.1
NetQ9_1: Q9.1 R32.2 R34.2 R36.2 | length 16.3
  Top Layer w0.5: R36.2 110.45,61.775 113.44,58.785 Q9.1 113.44,54.2 115.2,52.44 R32.2 R34.2
NetQ10_1: Q10.1 R33.2 R35.2 R37.2 | length 9.1
  Top Layer w0.5: 125.06,5.023 123.3,6.783 R35.2 123.325,8.175 126.175,8.175 126.3,8.3 128.3,8.3 R37.2
NetQ11_1: Q11.1 R38.2 R39.2 R40.2 | length 9.2
  Top Layer w0.5: 110.26,4.6 109.7,5.16 R38.2 R39.2 112.725,8.375 114.825,8.375 R40.2
NetR8_1: R8.1 R12.2 R30.1 R51.1 | length 3.4
  Top Layer w0.5: R30.1@5.143,49.982 R30.1 ; R12.2 R8.1
NetR15_1: R15.1 R18.2 R20.2 R25.1 R25.2 | length 10.7
  Top Layer w0.5: R25.2 R25.1 10.59,53.465 10.05,52.925 R15.1 ; R20.2 8.35,52.7 R15.1 ; R18.2 R15.1
NetR44_1: R44.1
NetR48_1: R48.1
REF: C8.2 IC1.13 IC1.14 IC2.5 R15.2 R16.2 R17.2 | length 63.3
  Top Layer w0.5: R16.2 12.032,52.461 12.2,52.629 12.2,53.175 13.011,53.986 13.011,57.85 12.571,58.289 4.189,58.289 1.618,55.718 1.618,40.045 8.062,40.045 IC1.14 12.3,37.599 ; IC1.13 12.3,37.599 ; IC2.5 20.3,32.661 19.861,33.1 C8.2 17.51,33.5 17.51,34.19 16.65,35.05 R17.2 12.3,37.599
V_sens: IC1.1 R30.2 R52.2 | length 2.7
  Top Layer w0.5: R30.2 5.178,48.112 5.428,47.862 IC1.1
V_SET: IC1.2 R18.1 R19.1 | length 4.8
  Top Layer w0.5: IC1.2 8.059,45.63 8.059,48.009 R19.1 R18.1
VCC: C5.2 C6.2 D7.1 IC1.8 IC1.11 IC1.12 | length 32.5
  Top Layer w0.5: D7.1 16.125,56.35 17.677,54.798 17.677,53.842 19.893,51.626 21.615,51.626 C6.2@23.048,50.193 ; IC1.12 15.588,40.02 16.027,40.459 18.128,40.459 ; IC1.11 18.128,40.459 ; C6.2 C6.2@23.048,50.193 ; 18.128,40.459 20.988,40.459 23.208,42.679 IC1.8 23.128,45.619 23.128,47.993 C5.2 C6.2@23.048,50.193
pads on no net: IC6.7 IC6.8 J3.2 J3.3 U1.3 U1.6 U1.10 U1.12 U1.13 U1.14 U1.15 X3.2 X3.3 X?.1 X?.2 X?.3 X?.4 X?.5 X?.6 X?.7 X?.8 X?.9 X?.10 X?.11 X?.12 X?.13 X?.14 X?.15 X?.16 X?.17 X?.18 X?.19 X?.20
copper on no net: | length 74.4
  Top Layer w0.45: 44.42,107 46.842,109.422 46.842,110.236 48.931,112.325 51.391,112.325 ; 46.96,107 46.96,108.158 50.477,111.675 51.391,111.675 ; 49.529,113.625 51.391,113.625 ; 51.391,116.875 51.5,116.875 v1(51.5,118.5) ; 57.267,112.975 59.485,112.975 59.88,112.58 59.88,112.534 60.129,112.285 61.715,112.285 64.15,109.85 ; 57.267,116.225 58.229,116.225 58.625,116.62 58.625,122.468 ; 57.267,116.875 57.267,122.907 ; 67.767,123.407 65.315,125.859 65.315,132.245 65.945,132.875 70.395,132.875 72.27,131 ; 69.125,122.968 65.965,126.128 65.965,131.976 66.214,132.225 68.505,132.225 69.73,131

## Silkscreen, mask and mechanical layers (free items; w line width, h text height)
Mechanical 1:
  lines w0.254: -3,0.5 225,0.5 ; 0,0 0,101 228,101 228,0

## Dimensions
0,0 to 0,101 on Dimensions
0,0 to 228,0 on Dimensions